# Altium PCB Ver1.0-2260_2023-12-28.pcbdoc
Units mm, origin at the board's own origin, x right, y up, seen from the top; angles counter-clockwise.
Board outline 57.4 x 86.87 mm, 2 copper layers (Top Layer, Bottom Layer); 35 components, 53 nets, 402 pads, 81 vias.
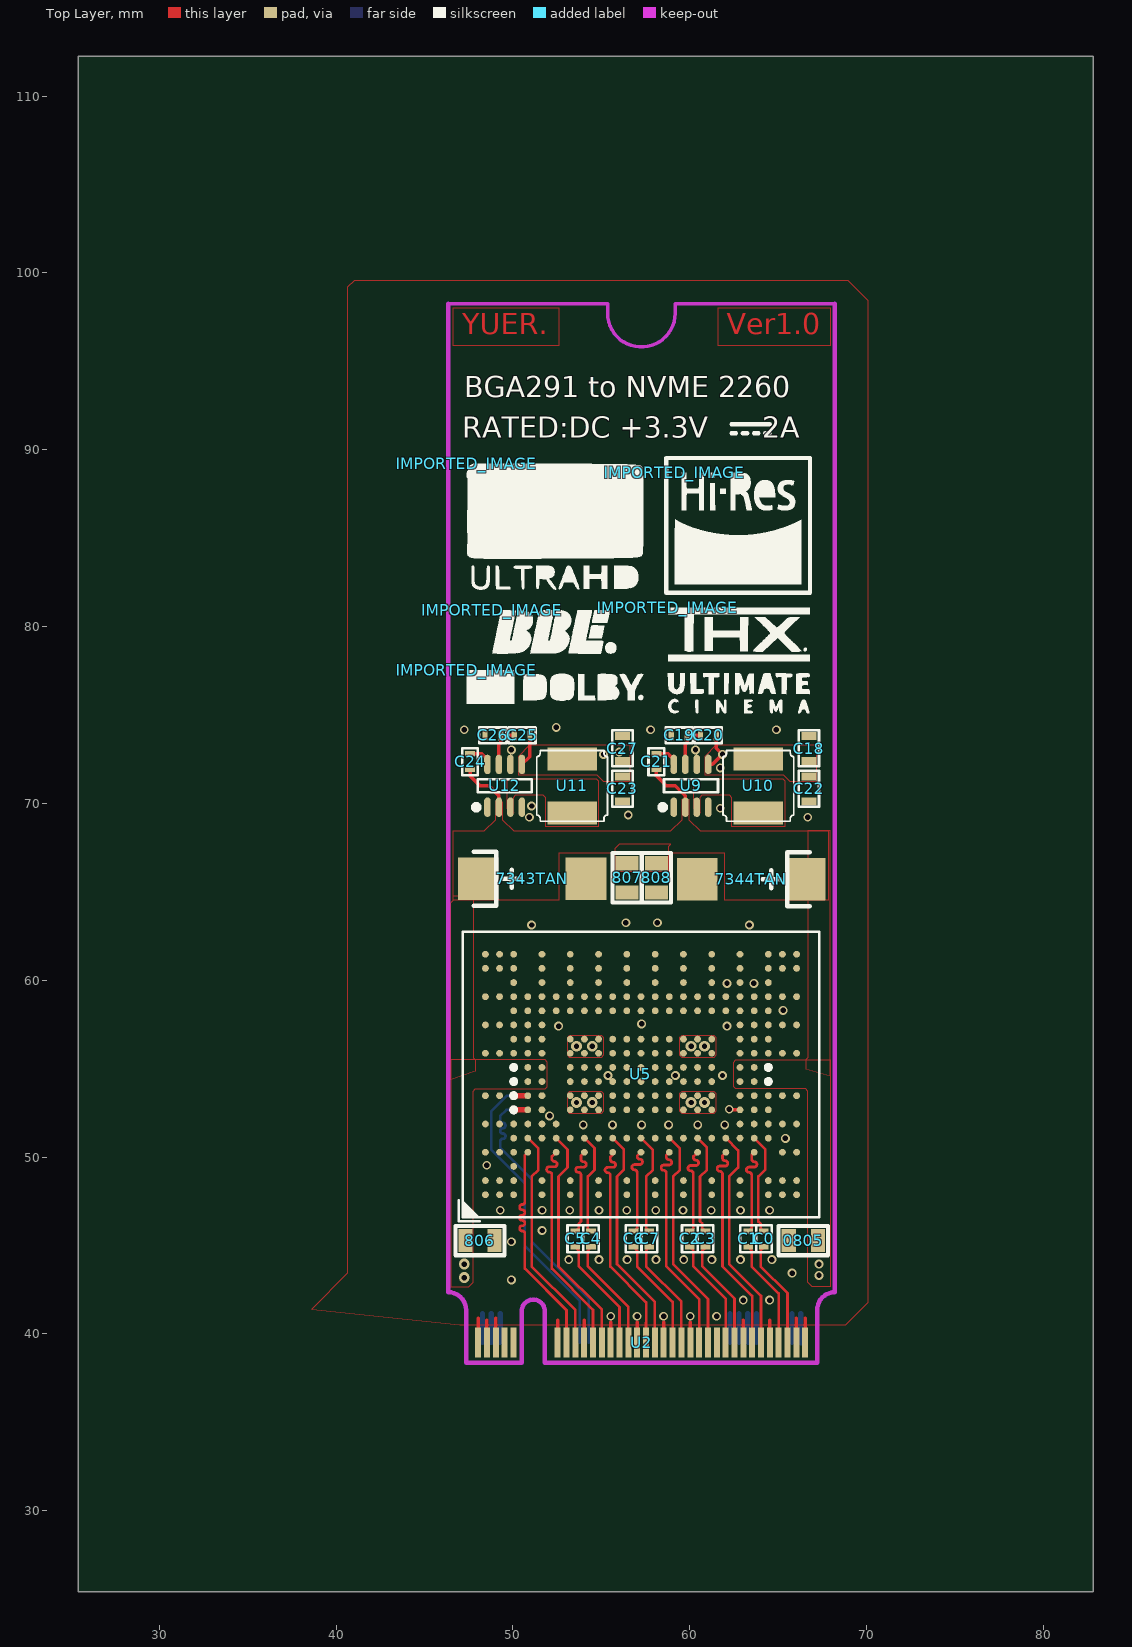
[diagram p0: Top Layer view]
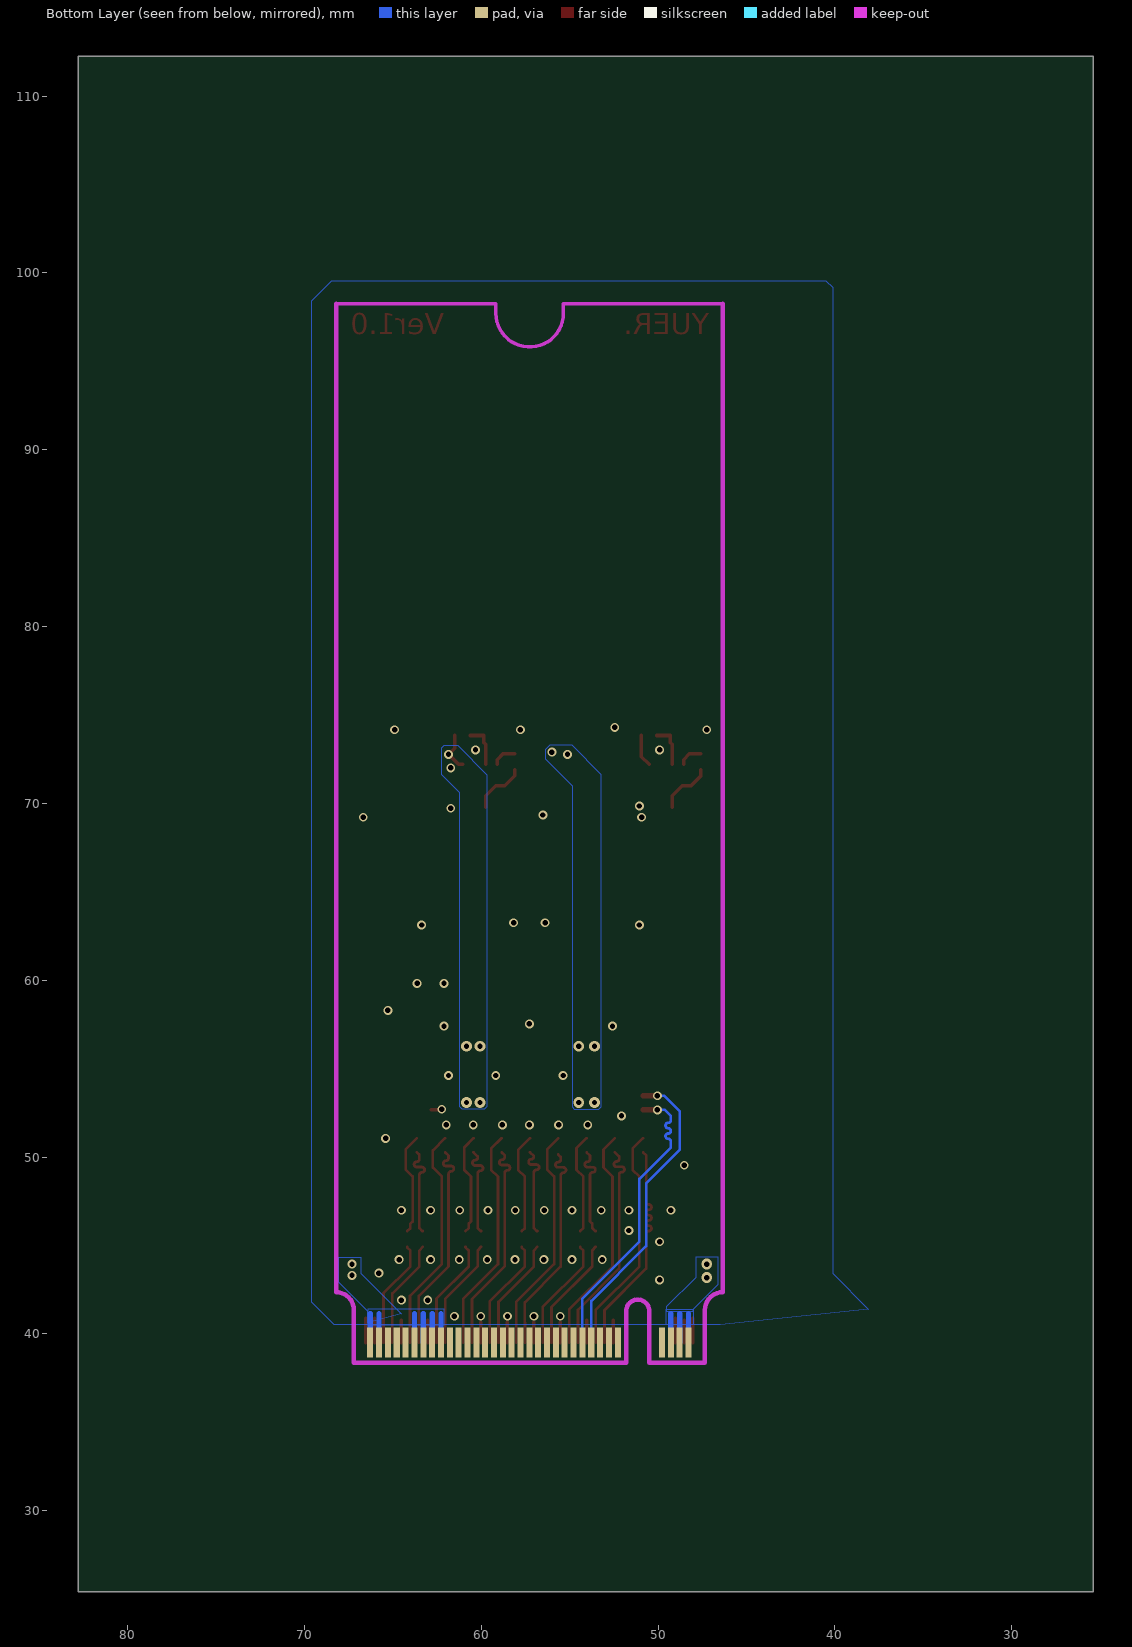
[diagram p1: Bottom Layer view, seen from below]

## Layer stack, top to bottom
Top Layer: signal copper (thickness not stored)
Dielectric: dielectric 0.32, FR-4, Dk 4.8
Bottom Layer: signal copper (thickness not stored)

## Board outline
82.804,25.4 25.4,25.4 25.4,112.268 82.804,112.268

## Components (designator, comment, footprint, x,y, rotation, side; value= is the part's Value field where it differs from the comment)
0805 "_" ?#1 67.691,46.482 r0 top
806 "_" ?#1 49.403,46.482 r0 top
807 "_" ?#1 55.245,67.056 r90 top
808 "_" ?#1 56.896,67.056 r90 top
7343TAN "_" ?#2 49.276,64.516 r180 top
7344TAN "_" ?#2 65.278,66.929 r0 top
C0 "0402" ?#3 65.405,44.831 r270 top
C1 "0402" ?#3 64.516,44.831 r270 top
C2 "0402" ?#3 61.214,44.831 r270 top
C3 "0402" ?#3 62.103,44.831 r270 top
C4 "0402" ?#3 55.626,44.831 r270 top
C5 "0402" ?#3 54.737,44.831 r270 top
C6 "0402" ?#3 58.039,44.831 r270 top
C7 "0402" ?#3 58.928,44.831 r270 top
C18 "0603" ?#4 67.945,71.628 r270 top
C19 "0402" ?#3 59.944,75.057 r0 top
C20 "0402" ?#3 61.595,75.057 r0 top
C21 "0402" ?#3 56.896,72.898 r90 top
C22 "0603" ?#4 67.945,69.342 r270 top
C23 "0603" ?#4 57.404,69.342 r270 top
C24 "0402" ?#3 46.355,72.898 r90 top
C25 "0402" ?#3 51.054,75.057 r0 top
C26 "0402" ?#3 49.403,75.057 r0 top
C27 "0603" ?#4 57.404,71.628 r270 top
IMPORTED_IMAGE "IMPORTED_IMAGE" IMPORTED_IMAGE 47.387,89.222 r0 top
IMPORTED_IMAGE "IMPORTED_IMAGE" IMPORTED_IMAGE 59.157,88.697 r0 top
IMPORTED_IMAGE "IMPORTED_IMAGE" IMPORTED_IMAGE 47.371,77.523 r0 top
IMPORTED_IMAGE "IMPORTED_IMAGE" IMPORTED_IMAGE 58.761,81.064 r0 top
IMPORTED_IMAGE "IMPORTED_IMAGE" IMPORTED_IMAGE 48.841,80.925 r0 top
U2 "M.2 M KEY FINGERS" "M.2 M KEY FINGERS" 57.277,38.354 r270 top
U5 "1620 BGA291SSD" "1620 BGA291SSD" 57.15,54.61 r0 top
U9 "MP2143" TSOT-23-8_L2.9-W1.6-P0.65-LS2.8-BR 60.071,70.993 r270 top
U10 "NR4018" NR4018 63.881,70.993 r0 top
U11 "NR4018" NR4018 53.34,70.993 r0 top
U12 "MP2143" TSOT-23-8_L2.9-W1.6-P0.65-LS2.8-BR 49.53,70.993 r270 top

## Footprints (in the part's own frame and the unit in brackets; to place one, negate y for a bottom-side part, rotate by r counter-clockwise, add the part's x,y. Pads: shape width x height; smd on the part's side, far side on the other; paste and mask are expansions set on the pad)
"1620 BGA291SSD" [mil]
  round 15.06 smd paste-3937 mask+2: A1(-342.92,-265.44) A2(-342.92,-233.94) A4(-342.92,-170.95) A6(-342.92,-107.96) A8(-342.92,-44.97) A11(-342.92,49.52) A13(-342.92,112.51) A15(-342.92,175.51) A17(-342.92,238.5) A18(-342.92,269.99) AA1(287,-265.44) AA2(287,-233.94) AA5(287,-139.45) AA6(287,-107.96) AA7(287,-76.46) AA8(287,-44.97) AA11(287,49.52) AA12(287,81.02) AA13(287,112.51) AA14(287,144.01) AA15(287,175.51) AA16(287,207) AA17(287,238.5) AA18(287,269.99) AB1(318.5,-265.44) AB2(318.5,-233.94) AB4(318.5,-170.95) AB6(318.5,-107.96) AB8(318.5,-44.97) AB11(318.5,49.52) AB13(318.5,112.51) AB15(318.5,175.51) AB17(318.5,238.5) AB18(318.5,269.99) AC1(350,-265.44) AC2(350,-233.94) AC4(350,-170.95) AC6(350,-107.96) AC8(350,-44.97) AC11(350,49.52) AC13(350,112.51) AC15(350,175.51) AC17(350,238.5) AC18(350,269.99) B1(-311.42,-265.44) B2(-311.42,-233.94) B4(-311.42,-170.95) B6(-311.42,-107.96) B8(-311.42,-44.97) B11(-311.42,49.52) B13(-311.42,112.51) B15(-311.42,175.51) B17(-311.42,238.5) B18(-311.42,269.99) C1(-279.92,-265.44) C2(-279.92,-233.94) C3(-279.92,-202.44) C4(-279.92,-170.95) C5(-279.92,-139.45) C6(-279.92,-107.96) C11(-279.92,49.52) C12(-279.92,81.02) C13(-279.92,112.51) C14(-279.92,144.01) C15(-279.92,175.51) C16(-279.92,207) C17(-279.92,238.5) C18(-279.92,269.99) D4(-248.43,-170.95) D5(-248.43,-139.45) D6(-248.43,-107.96) D7(-248.43,-76.46) D8(-248.43,-44.97) D9(-248.43,-13.47) D10(-248.43,18.03) D11(-248.43,49.52) D12(-248.43,81.02) D13(-248.43,112.51) D14(-248.43,144.01) D15(-248.43,175.51) E1(-216.93,-265.44) E2(-216.93,-233.94) E5(-216.93,-139.45) E6(-216.93,-107.96) E7(-216.93,-76.46) E8(-216.93,-44.97) E9(-216.93,-13.47) E10(-216.93,18.03) E11(-216.93,49.52) E12(-216.93,81.02) E13(-216.93,112.51) E14(-216.93,144.01) E15(-216.93,175.51) E16(-216.93,207) E17(-216.93,238.5) E18(-216.93,269.99) F4(-185.44,-170.95) F5(-185.44,-139.45) F6(-185.44,-107.96) F14(-185.44,144.01) F15(-185.44,175.51) G1(-153.94,-265.44) G2(-153.94,-233.94) G5(-153.94,-139.45) G7(-153.94,-76.46) G8(-153.94,-44.97) G9(-153.94,-13.47) G10(-153.94,18.03) G11(-153.94,49.52) G12(-153.94,81.02) G14(-153.94,144.01) G15(-153.94,175.51) G16(-153.94,207) G17(-153.94,238.5) G18(-153.94,269.99) H4(-122.44,-170.95) H5(-122.44,-139.45) H7(-122.44,-76.46) H8(-122.44,-44.97) H9(-122.44,-13.47) H10(-122.44,18.03) H11(-122.44,49.52) H12(-122.44,81.02) H14(-122.44,144.01) H15(-122.44,175.51) J1(-90.95,-265.44) J2(-90.95,-233.94) J5(-90.95,-139.45) J7(-90.95,-76.46) J8(-90.95,-44.97) J9(-90.95,-13.47) J10(-90.95,18.03) J11(-90.95,49.52) J12(-90.95,81.02) J14(-90.95,144.01) J15(-90.95,175.51) J16(-90.95,207) J17(-90.95,238.5) J18(-90.95,269.99) K4(-59.45,-170.95) K5(-59.45,-139.45) K7(-59.45,-76.46) K8(-59.45,-44.97) K9(-59.45,-13.47) K10(-59.45,18.03) K11(-59.45,49.52) K12(-59.45,81.02) K14(-59.45,144.01) K15(-59.45,175.51) L1(-27.96,-265.44) L2(-27.96,-233.94) L5(-27.96,-139.45) L7(-27.96,-76.46) L8(-27.96,-44.97) L9(-27.96,-13.47) L10(-27.96,18.03) L11(-27.96,49.52) L12(-27.96,81.02) L14(-27.96,144.01) L15(-27.96,175.51) L16(-27.96,207) L17(-27.96,238.5) L18(-27.96,269.99) M4(3.54,-170.95) M5(3.54,-139.45) M7(3.54,-76.46) M8(3.54,-44.97) M9(3.54,-13.47) M10(3.54,18.03) M11(3.54,49.52) M12(3.54,81.02) M14(3.54,144.01) M15(3.54,175.51) N1(35.04,-265.44) N2(35.04,-233.94) N5(35.04,-139.45) N7(35.04,-76.46) N8(35.04,-44.97) N9(35.04,-13.47) N10(35.04,18.03) N11(35.04,49.52) N12(35.04,81.02) N14(35.04,144.01) N15(35.04,175.51) N16(35.04,207) N17(35.04,238.5) N18(35.04,269.99) P4(66.53,-170.95) P5(66.53,-139.45) P7(66.53,-76.46) P8(66.53,-44.97) P9(66.53,-13.47) P10(66.53,18.03) P11(66.53,49.52) P12(66.53,81.02) P14(66.53,144.01) P15(66.53,175.51) R1(98.03,-265.44) R2(98.03,-233.94) R5(98.03,-139.45) R7(98.03,-76.46) R8(98.03,-44.97) R9(98.03,-13.47) R10(98.03,18.03) R11(98.03,49.52) R12(98.03,81.02) R14(98.03,144.01) R15(98.03,175.51) R16(98.03,207) R17(98.03,238.5) R18(98.03,269.99) T4(129.52,-170.95) T5(129.52,-139.45) T7(129.52,-76.46) T8(129.52,-44.97) T9(129.52,-13.47) T10(129.52,18.03) T11(129.52,49.52) T12(129.52,81.02) T14(129.52,144.01) T15(129.52,175.51) U1(161.02,-265.44) U2(161.02,-233.94) U5(161.02,-139.45) U7(161.02,-76.46) U8(161.02,-44.97) U9(161.02,-13.47) U10(161.02,18.03) U11(161.02,49.52) U12(161.02,81.02) U14(161.02,144.01) U15(161.02,175.51) U16(161.02,207) U17(161.02,238.5) U18(161.02,269.99) V4(192.52,-170.95) V5(192.52,-139.45) V14(192.52,144.01) V15(192.52,175.51) W1(224.01,-265.44) W2(224.01,-233.94) W5(224.01,-139.45) W6(224.01,-107.96) W7(224.01,-76.46) W8(224.01,-44.97) W9(224.01,-13.47) W10(224.01,18.03) W11(224.01,49.52) W12(224.01,81.02) W13(224.01,112.51) W14(224.01,144.01) W15(224.01,175.51) W16(224.01,207) W17(224.01,238.5) W18(224.01,269.99) Y4(255.51,-170.95) Y5(255.51,-139.45) Y6(255.51,-107.96) Y7(255.51,-76.46) Y8(255.51,-44.97) Y9(255.51,-13.47) Y10(255.51,18.03) Y11(255.51,49.52) Y12(255.51,81.02) Y13(255.51,112.51) Y14(255.51,144.01) Y15(255.51,175.51)
  silkscreen extent -402,-337 400,320
IMPORTED_IMAGE [mm]
  silkscreen extent 0,-7.13 9.99,0
"M.2 M KEY FINGERS" [mm]
  rect 1.7x0.34 smd paste+0 mask+0.102: 1(-1.15,9.25) 3(-1.15,8.75) 5(-1.15,8.249) 7(-1.15,7.749) 9(-1.15,7.249) 11(-1.15,6.749) 13(-1.15,6.249) 15(-1.15,5.749) 17(-1.15,5.249) 19(-1.15,4.749) 21(-1.15,4.249) 23(-1.15,3.749) 25(-1.15,3.249) 27(-1.15,2.749) 29(-1.15,2.249) 31(-1.15,1.749) 33(-1.15,1.249) 35(-1.15,0.749) 37(-1.15,0.249) 39(-1.15,-0.251) 41(-1.15,-0.751) 43(-1.15,-1.251) 45(-1.15,-1.751) 47(-1.15,-2.251) 49(-1.15,-2.751) 51(-1.15,-3.251) 53(-1.15,-3.751) 55(-1.15,-4.251) 57(-1.15,-4.751) 67(-1.15,-7.251) 69(-1.15,-7.751) 71(-1.15,-8.251) 73(-1.15,-8.751) 75(-1.15,-9.251)
  rect 1.7x0.34 smd far side paste+0 mask+0.102: 2(-1.15,9) 4(-1.15,8.501) 6(-1.15,8.001) 8(-1.15,7.501) 10(-1.15,7.001) 12(-1.15,6.501) 14(-1.15,6.001) 16(-1.15,5.501) 18(-1.15,5.001) 20(-1.151,4.499) 22(-1.15,4.001) 24(-1.15,3.501) 26(-1.15,3.001) 28(-1.15,2.501) 30(-1.15,2.001) 32(-1.15,1.501) 34(-1.15,1.001) 36(-1.15,0.501) 38(-1.15,0.001) 40(-1.15,-0.499) 42(-1.151,-0.998) 44(-1.15,-1.499) 46(-1.15,-1.999) 48(-1.15,-2.499) 50(-1.15,-2.999) 52(-1.15,-3.499) 54(-1.15,-3.999) 56(-1.15,-4.499) 58(-1.15,-4.999) 68(-1.15,-7.499) 70(-1.15,-7.999) 72(-1.15,-8.499) 74(-1.15,-8.999)
  Keep-Out Layer lines w0.254: -3,-9.93 0,-9.93 0,-6.78 -2.9,-6.78 ; -2.9,-5.48 0,-5.48 0,9.93 -3,9.93
  Keep-Out Layer lines w0.254: -4,-10.93 cw(c-3,-10.93) -3,-9.93 ; -2.9,-6.78 cw(c-2.931,-6.13) -2.9,-5.48 ; -3,9.93 cw(c-3,10.93) -4,10.93
NR4018 [mm]
  rect 2.8x1.3 smd paste+0 mask+0.102: 1(0,1.527) 2(0,-1.527)
  silkscreen extent -2,-2 2,2
TSOT-23-8_L2.9-W1.6-P0.65-LS2.8-BR [mm]
  oval 1.1x0.364 smd paste+0 mask+0.051: 1(1.211,-0.975) 2(1.211,-0.325) 3(1.211,0.325) 4(1.211,0.975) 5(-1.211,0.975) 6(-1.211,0.325) 7(-1.211,-0.325) 8(-1.211,-0.975)
  silkscreen extent -0.37,-1.76 1.36,1.53
?#1 [mm]
  rect 0.8x1.3 smd paste+0 mask+0.05: 1(-0.445,-1.217) 2(-2.095,-1.217)
  silkscreen extent -2.67,-2.04 0.13,-0.39
?#2 [mm]
  rect 2.3x2.4 smd paste+0 mask+0.051: 1(-4.851,-1.221) 1(1.245,-1.221)
  silkscreen extent -1.17,-2.74 1.5,0.3
?#3 [mm]
  rect 0.3x0.55 smd paste+0 mask+0.051: 1(-0.985,-1.217) 1(-0.096,-1.217)
  silkscreen extent -1.31,-1.66 0.22,-0.77
?#4 [mm]
  rect 0.45x0.85 smd paste+0 mask+0.051: 2(-2.173,-1.216) 2(-0.776,-1.216)
  silkscreen extent -2.5,-1.78 -0.47,-0.64

## Via types
v1: diameter 0.5, hole 0.305, Top Layer to Bottom Layer, tented both sides, 71 vias
v2: diameter 0.61, hole 0.305, Top Layer to Bottom Layer, tented both sides, 10 vias

## Nets (pads, with @x,y where several pads share a name; then routed paths per layer and width w, separated by ;. In a path a pad name is that pad's centre, name@x,y a point inside that pad or via, vN(x,y) a via of type N, cw(c..) or ccw(c..) an arc to the next point about the centre after c; other vN are vias at no path point)
1.2V: C23.2@56.188,71.515 C25.1@50.958,73.84 C27.2@56.188,72.404 U5.G7 U5.G8 U5.G11 U5.G12 U5.H7 U5.H8 U5.H11 U5.H12 U5.J7 U5.J8 U5.J11 U5.J12 U11.1 U12.5 | length 1.8
  Top Layer w0.2: U12.5 50.957,72.644 C25.1@50.957,73.84
  other v1: 55.118,72.771 56.007,72.898
  other v2: 53.594,53.086 54.483,53.086 53.594,56.261 54.483,56.261
1.8V: C18.2@66.729,72.404 C20.1@61.499,73.84 C22.2@66.729,71.515 U5.R7 U5.R8 U5.R11 U5.R12 U5.T7 U5.T8 U5.T11 U5.T12 U5.U7 U5.U8 U5.U11 U5.U12 U9.5 U10.1 | length 2.3
  Top Layer w0.2: U9.5 61.283,72.205 v1(61.849,72.771) 61.499,73.121 C20.1@61.499,73.84
  other v1: 61.722,72.009
  other v2: 60.071,53.086 60.833,53.086 60.071,56.261 60.833,56.261
3.3V: 0805.1 806.2 807.1 808.1 7343TAN.1@48.031,65.737 7344TAN.1@66.523,65.708 C21.1@58.113,71.913 C24.1@47.572,71.913 U2.2 U2.4 U2.12 U2.14 U2.16 U2.18 U2.70 U2.72 U2.74 U5.D9 U5.D10 U5.E9 U5.E10 U5.W9 U5.W10 U5.Y9 U5.Y10 U9.2 U12.2 | length 21
  Top Layer w0.2: C24.1@47.572,71.913 47.572,71.554 48.133,70.993 48.641,70.993 49.205,70.429 U12.2 ; C21.1@58.113,71.913 58.113,71.554 58.674,70.993 59.182,70.993 59.746,70.429 U9.2
  Bottom Layer w0.3: U2.74 48.278,41.148 ; 48.768,41.148 U2.72 ; U2.70 49.278,41.148 ; U2.18 62.278,41.148 ; U2.16 62.779,41.148 ; U2.14 63.278,41.148 ; U2.12 63.778,41.148 ; U2.4 65.778,41.148 ; U2.2 66.277,41.148
  other v1: 67.31,43.307 67.31,43.942
  other v2: 47.244,43.18 47.244,43.942
EN: C21.1@58.113,72.802 C24.1@47.572,72.802 U9.8 U12.8 | length 2.8
  Top Layer w0.2: C24.1@47.572,72.802 48.229,72.802 48.555,72.476 U12.8 ; C21.1@58.113,72.802 58.77,72.802 59.096,72.476 U9.8
FB: C19.1@59.848,73.84 C20.1@60.61,73.84 C25.1@50.069,73.84 C26.1@49.307,73.84 U9.7 U12.7 | length 4.9
  Top Layer w0.2: U12.7 49.205,73.335 49.306,73.436 C26.1@49.306,73.84 ; C26.1@49.307,73.84 C25.1@50.069,73.84 ; U9.7 59.746,73.335 59.847,73.436 C19.1@59.847,73.84 ; C19.1@59.848,73.84 C20.1@60.61,73.84
GND: 0805.2 806.1 807.2 808.2 7343TAN.1@54.127,65.737 7344TAN.1@60.427,65.708 C18.2@66.729,73.801 C19.1@58.959,73.84 C22.2@66.729,70.118 C23.2@56.188,70.118 C26.1@48.418,73.84 C27.2@56.188,73.801 U2.1 U2.3 U2.9 U2.15 U2.21 U2.27 U2.33 U2.39 U2.45 U2.51 U2.57 U2.71 U2.73 U2.75 U5.AA1 U5.AA2 U5.AA5 U5.AA14 U5.AA15 U5.C1 U5.C2 U5.C3 U5.C4 U5.C5 U5.C15 U5.D6 U5.D11 U5.E1 U5.E2 U5.E5 U5.E6 U5.E7 U5.E11 U5.E14 U5.E15 U5.F6 U5.G1 U5.G2 U5.G5 U5.G9 U5.G10 U5.G14 U5.G15 U5.H9 U5.H10 U5.J1 U5.J2 U5.J5 U5.J9 U5.J10 U5.J14 U5.J15 U5.K7 U5.K8 U5.K9 U5.K10 U5.K11 U5.K12 U5.L1 U5.L2 U5.L5 U5.L14 U5.L15 U5.M9 U5.M10 U5.N1 U5.N2 U5.N5 U5.N14 U5.N15 U5.P7 U5.P8 U5.P9 U5.P10 U5.P11 U5.P12 U5.R1 U5.R2 U5.R5 U5.R9 U5.R10 U5.R14 U5.R15 U5.T9 U5.T10 U5.U1 U5.U2 U5.U5 U5.U9 U5.U10 U5.U14 U5.U15 U5.W1 U5.W2 U5.W5 U5.W6 U5.W11 U5.W14 U5.W15 U5.Y6 U5.Y11 U5.Y13 U9.4 U9.6 U12.4 U12.6 | length 16.4
  Top Layer w0.2: U2.75 48.026,40.894 ; U2.73 48.526,40.767 ; U2.71 49.026,40.894 ; U2.57 52.526,40.767 ; U2.51 54.026,40.767 ; U2.45 55.526,40.64 ; U2.39 57.026,40.64 ; U2.33 58.526,40.64 ; U2.27 60.026,40.64 ; U2.15 63.026,40.767 ; U2.9 64.526,40.767 ; U2.3 66.027,40.894 ; U2.1 66.527,40.894
  other v1: 55.527,40.992 57.023,40.992 58.517,40.992 60.027,40.992 61.517,40.992 63.027,41.91 64.516,41.91 49.911,43.053 65.786,43.434 53.157,44.196 54.864,44.196 56.457,44.196 58.087,44.196 59.657,44.196 61.247,44.196 62.865,44.196 64.643,44.196 49.911,45.212 51.647,45.847 49.276,46.99 51.647,46.99 53.213,46.99 54.864,46.99 56.437,46.99 58.077,46.99 59.617,46.99 61.214,46.99 62.865,46.99 64.516,46.99 48.514,49.53 65.405,51.054 53.975,51.816 55.626,51.816 57.277,51.816 58.801,51.816 60.452,51.816 61.976,51.816 52.07,52.324 55.372,54.61 59.182,54.61 61.849,54.61 52.578,57.404 62.103,57.404 57.277,57.531 65.278,58.293 62.103,59.817 63.627,59.817 51.054,63.119 63.373,63.119 56.388,63.246 58.166,63.246 50.927,69.215 66.675,69.215 56.515,69.342 61.722,69.723 51.054,69.85 49.911,73.025 60.325,73.025 47.244,74.168 57.785,74.168 64.897,74.168 52.451,74.295
LED:  | length 0.6
  Top Layer w0.2: v1(62.23,52.705) 62.268,52.667 62.84,52.667
NC: 
POWERGOOD: U9.1 U12.1
S$1271: 
S$1273: 
S$1347: 
S$1349: 
S$1351: 
S$17489: 
S$17493: 
S$81905: 
S$82656: U2.13 U5.V4 | length 12.3
  Top Layer w0.15: U5.V4 61.849,50.079 61.849,49.94 ccw(c61.999,49.94) 61.999,49.79 cw(c61.997,49.64) 61.999,49.49 61.849,49.49 61.699,49.49 ccw(c61.701,49.34) 61.699,49.19 cw(c61.699,49.04) 61.849,49.04 61.849,43.815 63.525,42.139 U2.13
S$82660: U2.11 U5.V5 | length 12.8
  Top Layer w0.15: U5.V5 62.738,50.371 62.738,49.403 62.23,48.895 62.23,43.942 64.026,42.146 U2.11
S$89547: C1.1 U2.7 U5.Y4 | length 11.6
  Top Layer w0.15: C1.1@63.299,45.816 63.342,45.816 63.5,45.974 63.5,46.228 63.5,48.982 ccw(c63.35,48.982) 63.35,49.132 cw(c63.352,49.282) 63.35,49.432 63.5,49.432 63.65,49.432 ccw(c63.648,49.582) 63.65,49.732 cw(c63.65,49.882) 63.5,49.882 63.5,50.128 U5.Y4@63.64,50.268 ; C1.1@63.299,44.928 63.5,44.704 63.5,44.45 63.5,43.815 65.027,42.288 U2.7
S$89551: C0.1 U2.5 U5.Y5 | length 11.9
  Top Layer w0.15: U5.Y5 64.262,50.447 64.262,49.276 63.881,48.895 63.881,46.355 64.008,46.228 64.008,45.974 C0.1@64.188,45.817 ; C0.1@64.188,44.928 64.188,44.884 64.008,44.704 64.008,44.45 64.008,43.815 65.527,42.296 U2.5
S$89662: C2.1@59.997,44.927 | length 6.3
  Top Layer w0.15: C2.1@59.997,44.928 60.198,44.704 60.198,44.45 60.198,43.815 62.027,41.986 62.027,40.589 ; 62.026,39.504 62.026,40.64
S$89666: C3.1@60.886,44.927 | length 6.3
  Top Layer w0.15: C3.1@60.886,44.928 60.886,44.884 60.706,44.704 60.706,44.45 60.706,43.815 62.527,41.994 62.527,40.546 ; 62.526,39.504 62.526,40.64
S$89676: C2.1@59.997,45.816 U5.T4 | length 5.5
  Top Layer w0.15: C2.1@59.997,45.816 60.04,45.816 60.198,45.974 60.198,46.101 60.198,49.071 ccw(c60.048,49.071) 60.048,49.221 cw(c60.05,49.371) 60.048,49.521 60.198,49.521 60.348,49.521 ccw(c60.346,49.671) 60.348,49.821 cw(c60.348,49.971) 60.198,49.971 60.198,50.026 U5.T4@60.44,50.268
S$89680: C3.1@60.886,45.816 U5.T5 | length 5.8
  Top Layer w0.15: U5.T5 60.96,50.549 60.96,49.276 60.579,48.895 60.579,46.355 60.706,46.228 60.706,46.101 60.706,45.974 C3.1@60.886,45.817
S$89714: U5.P5 | length 12.8
  Top Layer w0.15: U5.P5 59.436,50.472 59.436,49.276 59.055,48.895 59.055,43.942 61.026,41.971 61.026,40.64 61.026,39.504
S$89718: U5.P4 | length 12.4
  Top Layer w0.15: U5.P4@58.84,50.268 58.674,50.102 58.674,49.996 ccw(c58.824,49.996) 58.824,49.846 cw(c58.822,49.696) 58.824,49.546 58.674,49.546 58.524,49.546 ccw(c58.526,49.396) 58.524,49.246 cw(c58.524,49.096) 58.674,49.096 58.674,43.815 60.526,41.963 60.526,40.64 60.526,39.504
S$89746: C7.1@57.711,44.927 | length 6.4
  Top Layer w0.15: C7.1@57.711,44.928 57.711,44.884 57.531,44.704 57.531,44.577 57.531,43.815 59.526,41.82 59.526,40.554 ; 59.526,39.504 59.526,40.64
S$89750: C6.1@56.822,44.927 | length 6.3
  Top Layer w0.15: C6.1@56.822,44.928 57.023,44.704 57.023,44.577 57.023,43.815 59.027,41.811 59.027,40.64 ; 59.026,39.504 59.026,40.64
S$89763: C6.1@56.822,45.816 U5.M4 | length 5.5
  Top Layer w0.15: C6.1@56.822,45.816 56.865,45.816 57.023,45.974 57.023,46.101 57.023,49.125 ccw(c56.873,49.125) 56.873,49.275 cw(c56.875,49.425) 56.873,49.575 57.023,49.575 57.173,49.575 ccw(c57.171,49.725) 57.173,49.875 cw(c57.173,50.025) 57.023,50.025 57.023,50.051 U5.M4@57.24,50.268
S$89767: C7.1@57.711,45.816 U5.M5 | length 5.8
  Top Layer w0.15: U5.M5@57.24,51.068 57.912,50.396 57.912,49.276 57.531,48.895 57.531,46.101 57.531,45.974 C7.1@57.711,45.817
S$89801: U5.K5 | length 12.9
  Top Layer w0.15: U5.K5@55.64,51.068 56.261,50.447 56.261,49.276 55.88,48.895 55.88,43.942 58.026,41.796 58.026,40.64 58.026,39.504
S$89805: U5.K4 | length 12.5
  Top Layer w0.15: U5.K4@55.645,50.141 55.504,50 55.504,49.863 ccw(c55.654,49.863) 55.654,49.713 cw(c55.652,49.563) 55.654,49.413 55.504,49.413 55.354,49.413 ccw(c55.356,49.263) 55.354,49.113 cw(c55.354,48.963) 55.504,48.963 55.504,43.81 57.531,41.783 57.531,40.513 ; 57.526,39.504 57.526,40.64
S$89833: C4.1@54.409,44.927 | length 6.4
  Top Layer w0.15: C4.1@54.409,44.928 54.409,44.884 54.229,44.704 54.229,44.45 54.229,43.815 56.526,41.518 56.526,40.64 56.526,39.504
S$89837: C5.1@53.52,44.927 | length 6.5
  Top Layer w0.15: C5.1@53.52,44.928 53.721,44.704 53.721,44.45 53.721,43.815 56.027,41.509 56.027,40.64 ; 56.026,39.504 56.026,40.64
S$89847: C5.1@53.52,45.816 U5.H4 | length 5.5
  Top Layer w0.15: C5.1@53.52,45.816 53.563,45.816 53.721,45.974 53.721,46.101 53.721,46.228 53.848,46.355 53.848,48.981 ccw(c53.698,48.981) 53.698,49.131 cw(c53.7,49.281) 53.698,49.431 53.848,49.431 53.998,49.431 ccw(c53.996,49.581) 53.998,49.731 cw(c53.998,49.881) 53.848,49.881 53.848,50.076 U5.H4@54.04,50.268
S$89851: C4.1@54.409,45.816 U5.H5 | length 5.7
  Top Layer w0.15: U5.H5 54.61,50.498 54.61,49.276 54.229,48.895 54.229,46.101 54.229,45.974 C4.1@54.409,45.817
S$89888: U5.F5 | length 13.1
  Top Layer w0.15: U5.F5 53.086,50.422 53.086,49.403 52.578,48.895 52.578,43.815 55.027,41.366 55.027,40.64 55.026,39.504
S$89898: U5.F4 | length 12.6
  Top Layer w0.15: U5.F4@52.44,50.268 52.197,50.025 52.197,49.897 ccw(c52.347,49.897) 52.347,49.747 cw(c52.345,49.597) 52.347,49.447 52.197,49.447 52.047,49.447 ccw(c52.049,49.297) 52.047,49.147 cw(c52.047,48.997) 52.197,48.997 52.197,43.688 54.526,41.359 54.526,40.64 54.526,39.504
S$89926: U5.D5 | length 13
  Top Layer w0.15: U5.D5 51.435,50.472 51.435,49.276 51.054,48.895 51.054,43.815 53.525,41.344 53.525,40.64 ; 53.526,39.504 53.526,40.64
S$89930: U5.D4 | length 12.8
  Top Layer w0.15: U5.D4@50.84,50.268 50.673,50.101 50.673,47.464 cw(c50.523,47.464) 50.523,47.314 ccw(c50.523,47.164) 50.523,47.014 cw(c50.523,46.864) 50.673,46.864 cw(c50.523,46.864) 50.523,46.714 ccw(c50.523,46.564) 50.523,46.414 cw(c50.523,46.264) 50.673,46.264 cw(c50.523,46.264) 50.523,46.114 ccw(c50.523,45.964) 50.523,45.814 cw(c50.523,45.664) 50.673,45.664 50.673,43.688 53.028,41.333 53.028,40.64 ; 53.026,39.504 53.026,40.64
S$89994: U2.50 U2.52 | length 34.9
  Top Layer w0.3: v1(50.04,52.668) 50.84,52.668 ; v1(50.04,53.468) 50.84,53.468
  Bottom Layer w0.15: v1(50.04,52.668) 49.62,52.668 49.276,52.324 49.276,52.082 ccw(c49.426,52.082) 49.426,51.932 cw(c49.426,51.782) 49.426,51.631 ccw(c49.426,51.481) 49.276,51.481 ccw(c49.426,51.481) 49.426,51.331 cw(c49.426,51.181) 49.426,51.031 ccw(c49.426,50.881) 49.276,50.882 49.276,50.546 51.054,48.768 51.054,48.326 51.054,45.212 54.277,41.989 U2.50 ; v1(50.04,53.468) 49.657,53.467 48.768,52.578 48.768,50.419 50.673,48.514 50.673,48.331 50.673,44.958 53.777,41.854 U2.52
S$115904: 
S$116199: 
S$116216: 
S$116224: 
S$117402: 
S$117406: 
S$117410: 
S$117420: 
S$117424: 
S$118253: 
SW: U9.3 U10.2 U11.2 U12.3
pads on no net: U2.6 U2.8 U2.10 U2.17 U2.19 U2.20 U2.22 U2.23 U2.24 U2.25 U2.26 U2.28 U2.29 U2.30 U2.31 U2.32 U2.34 U2.35 U2.36 U2.37 U2.38 U2.40 U2.41 U2.42 U2.43 U2.44 U2.46 U2.47 U2.48 U2.49 U2.53 U2.54 U2.55 U2.56 U2.58 U2.67 U2.68 U2.69 U5.A1 U5.A2 U5.A4 U5.A6 U5.A8 U5.A11 U5.A13 U5.A15 U5.A17 U5.A18 U5.AA6 U5.AA7 U5.AA8 U5.AA11 U5.AA12 U5.AA13 U5.AA16 U5.AA17 U5.AA18 U5.AB1 U5.AB2 U5.AB4 U5.AB6 U5.AB8 U5.AB11 U5.AB13 U5.AB15 U5.AB17 U5.AB18 U5.AC1 U5.AC2 U5.AC4 U5.AC6 U5.AC8 U5.AC11 U5.AC13 U5.AC15 U5.AC17 U5.AC18 U5.B1 U5.B2 U5.B4 U5.B6 U5.B8 U5.B11 U5.B13 U5.B15 U5.B17 U5.B18 U5.C6 U5.C11 U5.C12 U5.C13 U5.C14 U5.C16 U5.C17 U5.C18 U5.D7 U5.D8 U5.D12 U5.D13 U5.D14 U5.D15 U5.E8 U5.E12 U5.E13 U5.E16 U5.E17 U5.E18 U5.F14 U5.F15 U5.G16 U5.G17 U5.G18 U5.H14 U5.H15 U5.J16 U5.J17 U5.J18 U5.K14 U5.K15 U5.L7 U5.L8 U5.L9 U5.L10 U5.L11 U5.L12 U5.L16 U5.L17 U5.L18 U5.M7 U5.M8 U5.M11 U5.M12 U5.M14 U5.M15 U5.N7 U5.N8 U5.N9 U5.N10 U5.N11 U5.N12 U5.N16 U5.N17 U5.N18 U5.P14 U5.P15 U5.R16 U5.R17 U5.R18 U5.T14 U5.T15 U5.U16 U5.U17 U5.U18 U5.V14 U5.V15 U5.W7 U5.W8 U5.W12 U5.W13 U5.W16 U5.W17 U5.W18 U5.Y7 U5.Y8 U5.Y12 U5.Y14 U5.Y15

## Polygon pours and split planes (outlines as drawn)
3.3V on Bottom Layer (solid): 66.421,40.513 62.103,40.513 62.103,41.402 66.421,41.402
3.3V on Bottom Layer (solid): 48.006,40.513 49.53,40.513 49.53,41.402 48.006,41.402
3.3V on Bottom Layer (solid): 47.879,44.323 47.879,43.18 49.53,41.529 49.53,41.275 48.006,41.275 48.006,41.402 46.609,42.799 46.609,44.323
3.3V on Bottom Layer (solid): 66.421,40.64 66.421,41.275 68.072,42.926 68.072,44.323 66.802,44.323 66.802,43.434 64.516,41.148
1.8V on Bottom Layer (solid): 59.69,52.832 59.817,52.705 61.087,52.705 61.214,52.832 61.214,70.612 62.23,71.628 62.23,73.152 62.103,73.279 61.341,73.279 59.69,71.628
1.2V on Bottom Layer (solid): 54.864,52.832 54.737,52.705 53.34,52.705 53.213,52.832 53.213,71.628 54.864,73.279 56.134,73.279 56.388,73.025 56.388,72.517 54.864,70.993
GND on Bottom Layer (solid): 46.482,40.513 68.326,40.513 69.596,41.783 69.596,98.425 68.453,99.568 40.513,99.568 40.132,99.187 40.132,43.434 38.1,41.402
3.3V on Top Layer (solid): 47.752,42.926 47.752,53.721 47.879,53.848 51.816,53.848 51.943,53.975 51.943,55.372 51.816,55.499 46.482,55.499 46.482,42.672 47.498,42.672
3.3V on Top Layer (solid): 66.675,42.926 66.675,53.721 66.548,53.848 62.611,53.848 62.484,53.975 62.484,55.372 62.611,55.499 67.945,55.499 67.945,42.672 66.929,42.672
3.3V on Top Layer (solid): 59.563,70.231 59.944,70.231 59.944,69.088 60.579,68.453 67.818,68.453 67.818,64.516 61.976,64.516 61.976,67.183 52.578,67.183 52.578,64.516 46.609,64.516 46.609,68.453 48.387,68.453 49.022,69.088 49.022,70.104 49.403,70.104 49.403,69.088 50.038,68.453 58.928,68.453 59.563,69.088
3.3V on Top Layer (solid): 55.753,66.167 58.801,66.167 58.801,67.564 58.928,67.691 56.007,67.691 55.753,67.437
1.8V on Top Layer (solid): 60.833,71.628 65.278,71.628 65.659,71.247 67.183,71.247 67.183,73.279 61.468,73.279 60.833,72.644
1.2V on Top Layer (solid): 50.292,71.628 54.737,71.628 55.118,71.247 56.642,71.247 56.642,73.279 50.927,73.279 50.292,72.644
3.3V on Top Layer (solid): 67.945,54.61 67.945,68.453 66.675,68.453 66.675,55.626 66.548,55.499 66.548,54.991
3.3V on Top Layer (solid): 46.482,54.356 46.482,64.389 46.609,64.516 46.609,64.77 46.863,64.77 47.752,64.77 47.752,55.626 47.879,55.499 47.879,54.864
SW on Top Layer (solid): 60.579,69.469 60.579,70.358 60.706,70.485 62.23,70.485 62.357,70.358 62.357,68.707 65.405,68.707 65.405,71.247 65.278,71.374 60.325,71.374 60.198,71.247 60.198,69.723
SW on Top Layer (solid): 50.038,69.469 50.038,70.358 50.165,70.485 51.689,70.485 51.816,70.358 51.816,68.707 54.864,68.707 54.864,71.247 54.737,71.374 49.784,71.374 49.657,71.247 49.657,69.723
1.8V on Top Layer (solid): 59.563,56.896 61.341,56.896 61.468,56.769 61.468,55.753 61.341,55.626 59.563,55.626 59.436,55.753 59.436,56.769
1.8V on Top Layer (solid): 59.563,53.721 61.341,53.721 61.468,53.594 61.468,52.578 61.341,52.451 59.563,52.451 59.436,52.578 59.436,53.594
1.2V on Top Layer (solid): 53.213,56.896 54.991,56.896 55.118,56.769 55.118,55.753 54.991,55.626 53.213,55.626 53.086,55.753 53.086,56.769
1.2V on Top Layer (solid): 53.213,53.721 54.991,53.721 55.118,53.594 55.118,52.578 54.991,52.451 53.213,52.451 53.086,52.578 53.086,53.594
NC on Top Layer (solid): 61.595,98.044 67.945,98.044 67.945,95.885 61.595,95.885
NC on Top Layer (solid): 46.609,98.044 52.578,98.044 52.578,95.885 46.609,95.885
GND on Top Layer (solid): 46.99,40.513 68.834,40.513 70.104,41.783 70.104,98.425 68.961,99.568 41.021,99.568 40.64,99.187 40.64,43.434 38.608,41.402

## Keep-outs
Keep-Out Layer:
  lines w0.2 net S$115904: 55.352,97.719 ccw(c57.261,97.719) 59.17,97.719

## Other copper
Top Layer:
  text "YUER." at 47.117,96.139 h2.03
  text "Ver1.0" at 62.103,96.139 h2.03

## Silkscreen, mask and mechanical layers (free items; w line width, h text height)
Top Overlay:
  lines w0.245 net S$117402: 62.357,91.44 64.516,91.44
  lines w0.245 net S$117406: 62.357,90.932 62.611,90.932
  lines w0.245 net S$117410: 62.992,90.932 63.246,90.932
  lines w0.245 net S$117420: 63.627,90.932 63.881,90.932
  lines w0.245 net S$117424: 64.262,90.932 64.516,90.932
  lines w0.245 net S$118253: 58.674,81.915 66.802,81.915 66.802,89.535 58.674,89.535 58.674,89.281 58.674,81.915
  text "BGA291 to NVME 2260" at 47.244,92.583 h2.03
  text "RATED:DC +3.3V      2A" at 47.117,90.297 h2.03
Top Solder:
  rectangle: 47.117,38.1 67.564,40.513
  region net S$116216: 54.737,98.425 54.737,96.977 56.245,95.469 58.517,95.469 59.295,96.247 59.295,96.546 59.66,96.912 59.66,98.963 59.436,99.187 55.372,99.187 55.118,98.933
  lines w1 net S$116199: 54.737,97.79 ccw(c57.277,97.79) 59.817,97.79
  lines w1 net S$116216: 54.737,97.79 54.737,98.425
  lines w1 net S$116224: 59.817,97.79 59.817,98.425
Bottom Solder:
  rectangle: 47.117,38.1 67.564,40.513